# Altium PCB led_em_kian_110v_v2_TEST2.PcbDoc
Units mil, origin at the board's own origin, x right, y up, seen from the top; angles counter-clockwise.
Board outline 4067 x 3086 mil, 2 copper layers (Top Layer, Bottom Layer); 69 components, 37 nets, 183 pads, 0 vias.
Unrouted connection lines stored in the file: 6.
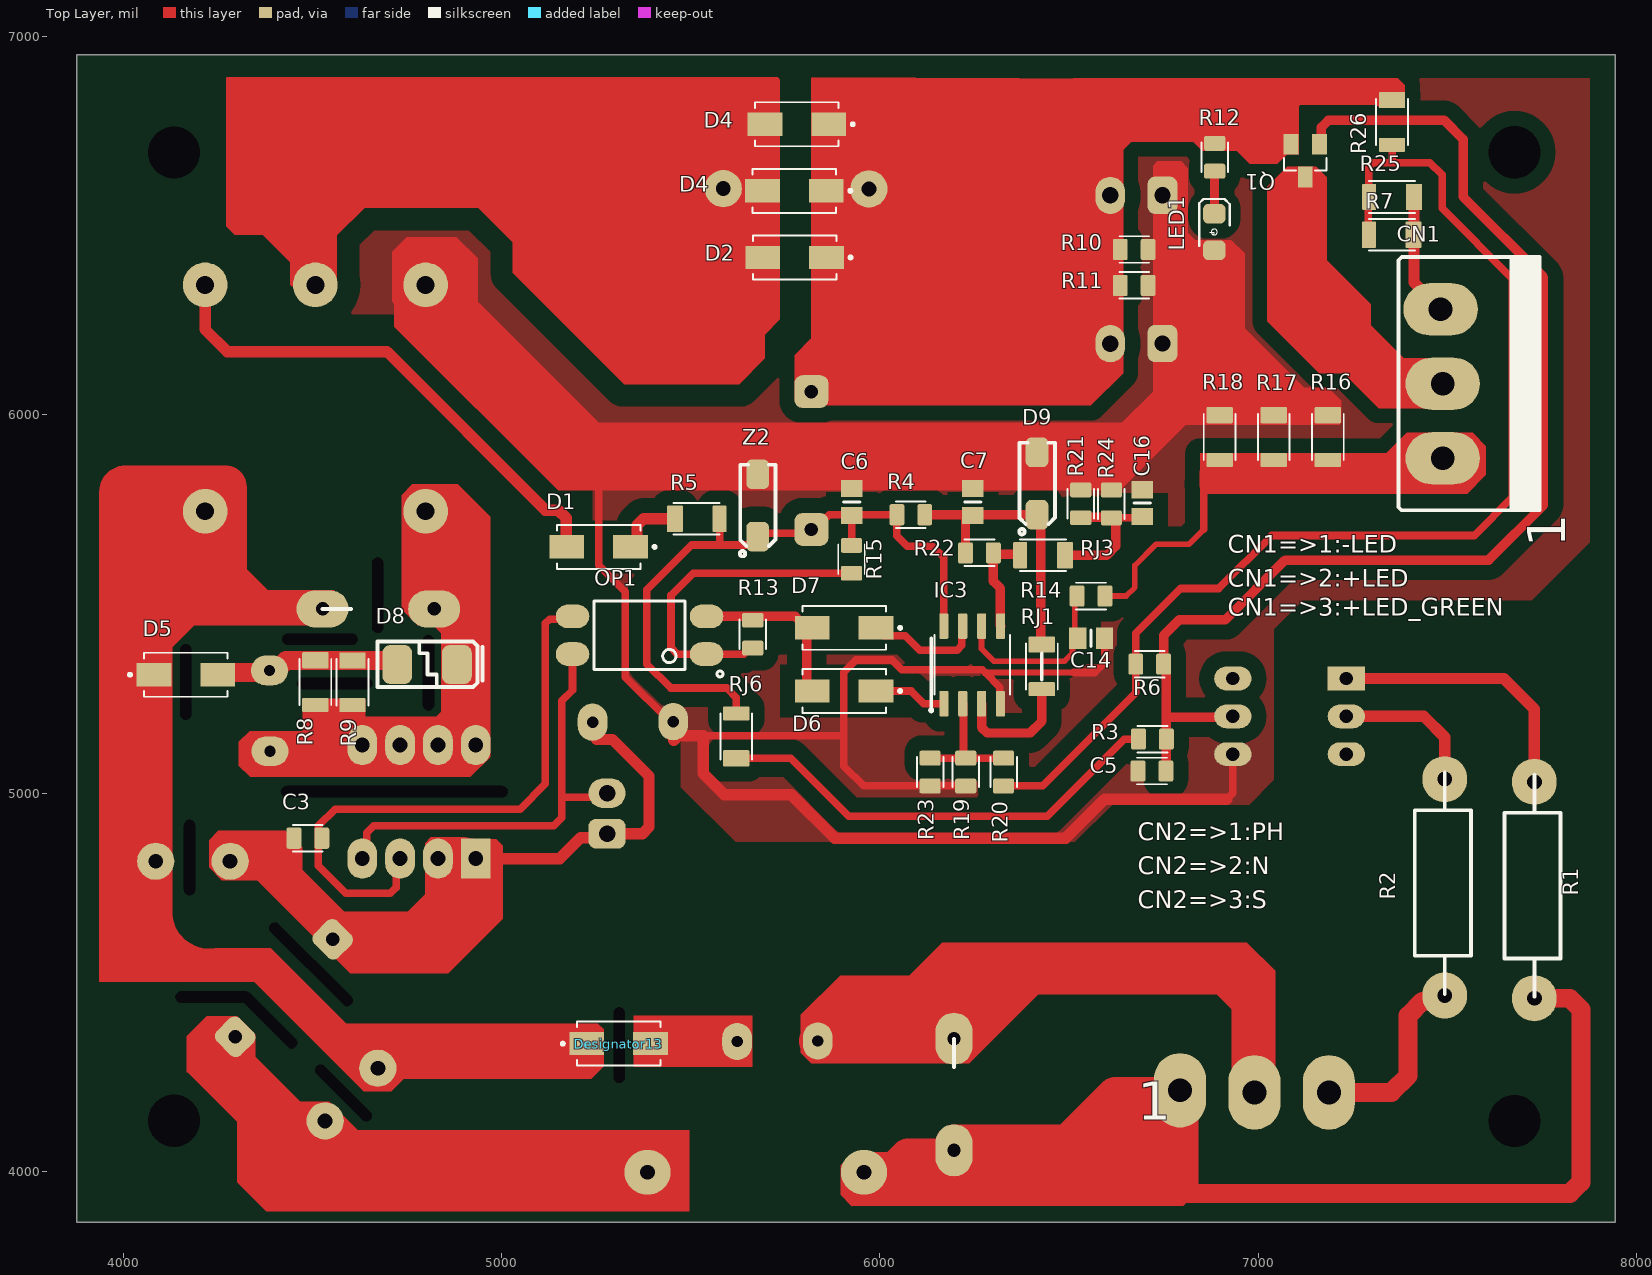
[diagram p0: Top Layer view]
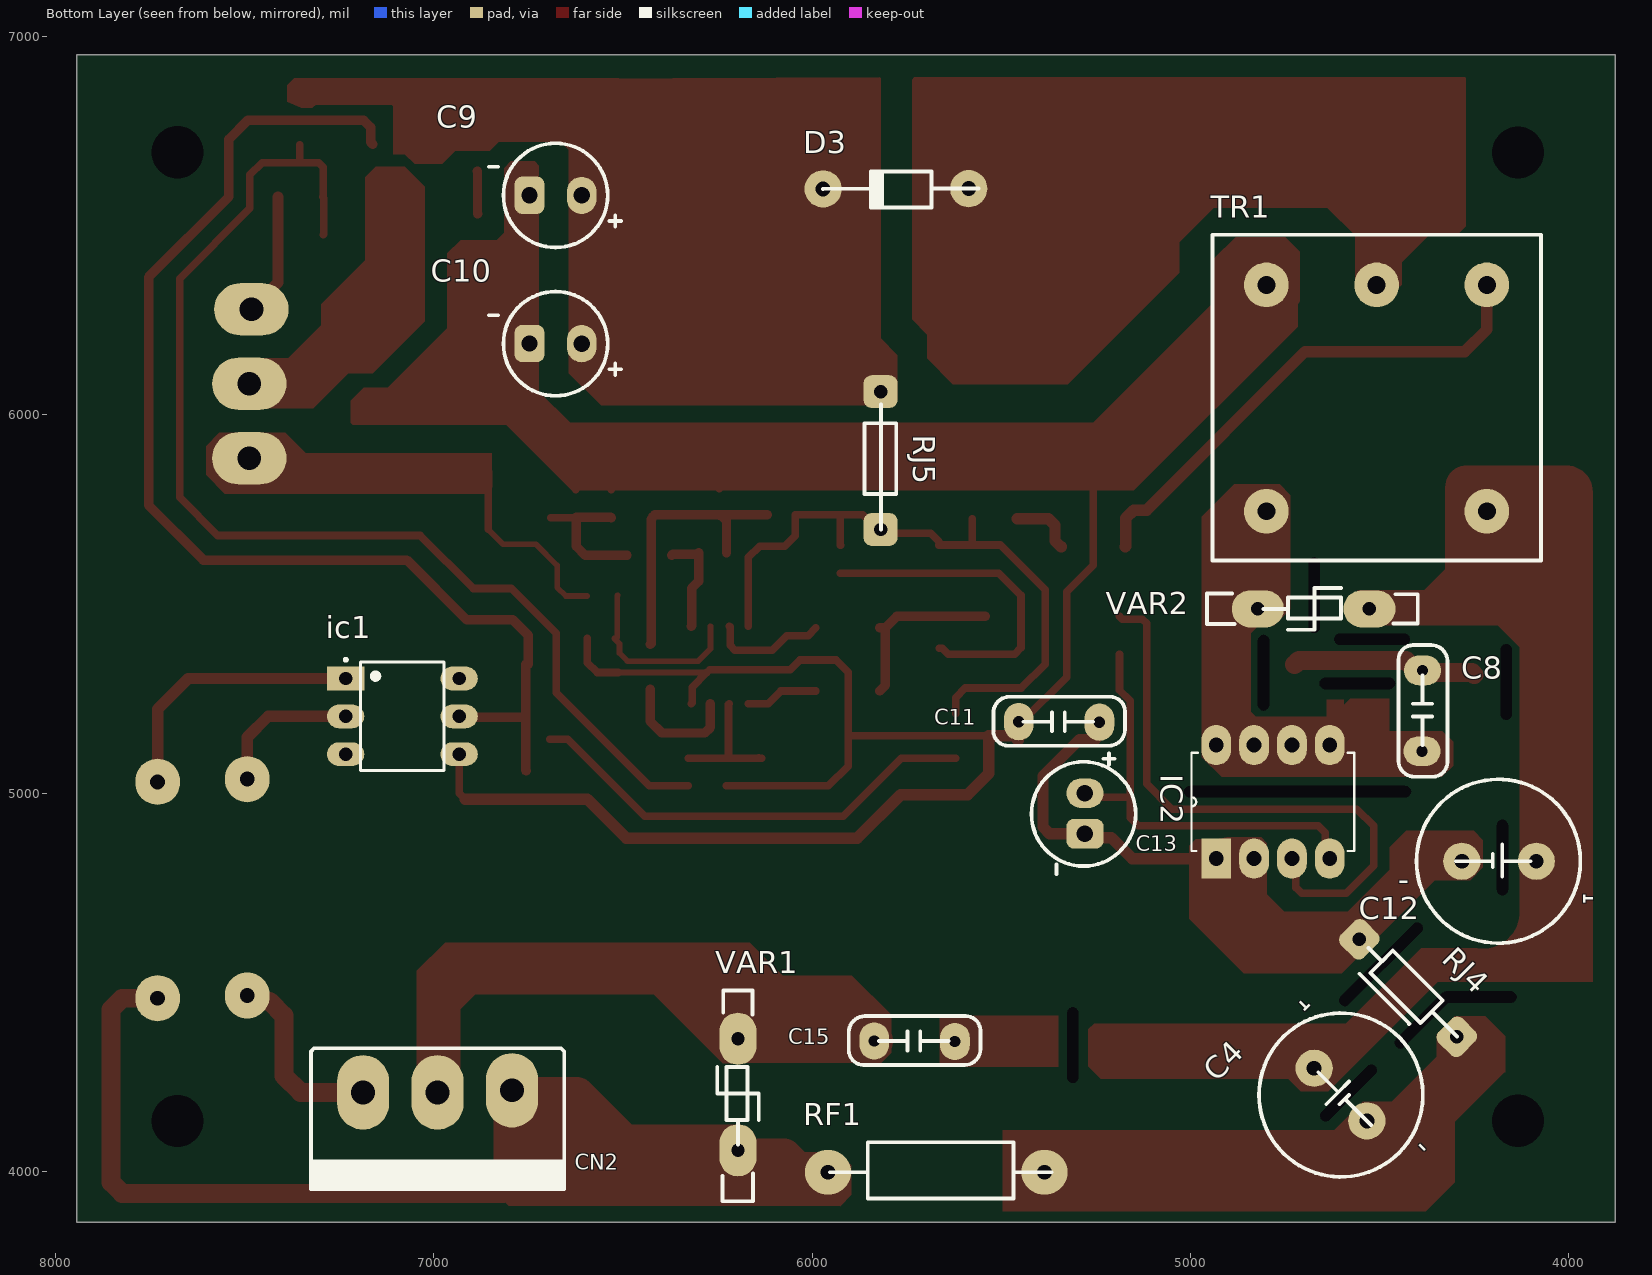
[diagram p1: Bottom Layer view, seen from below]
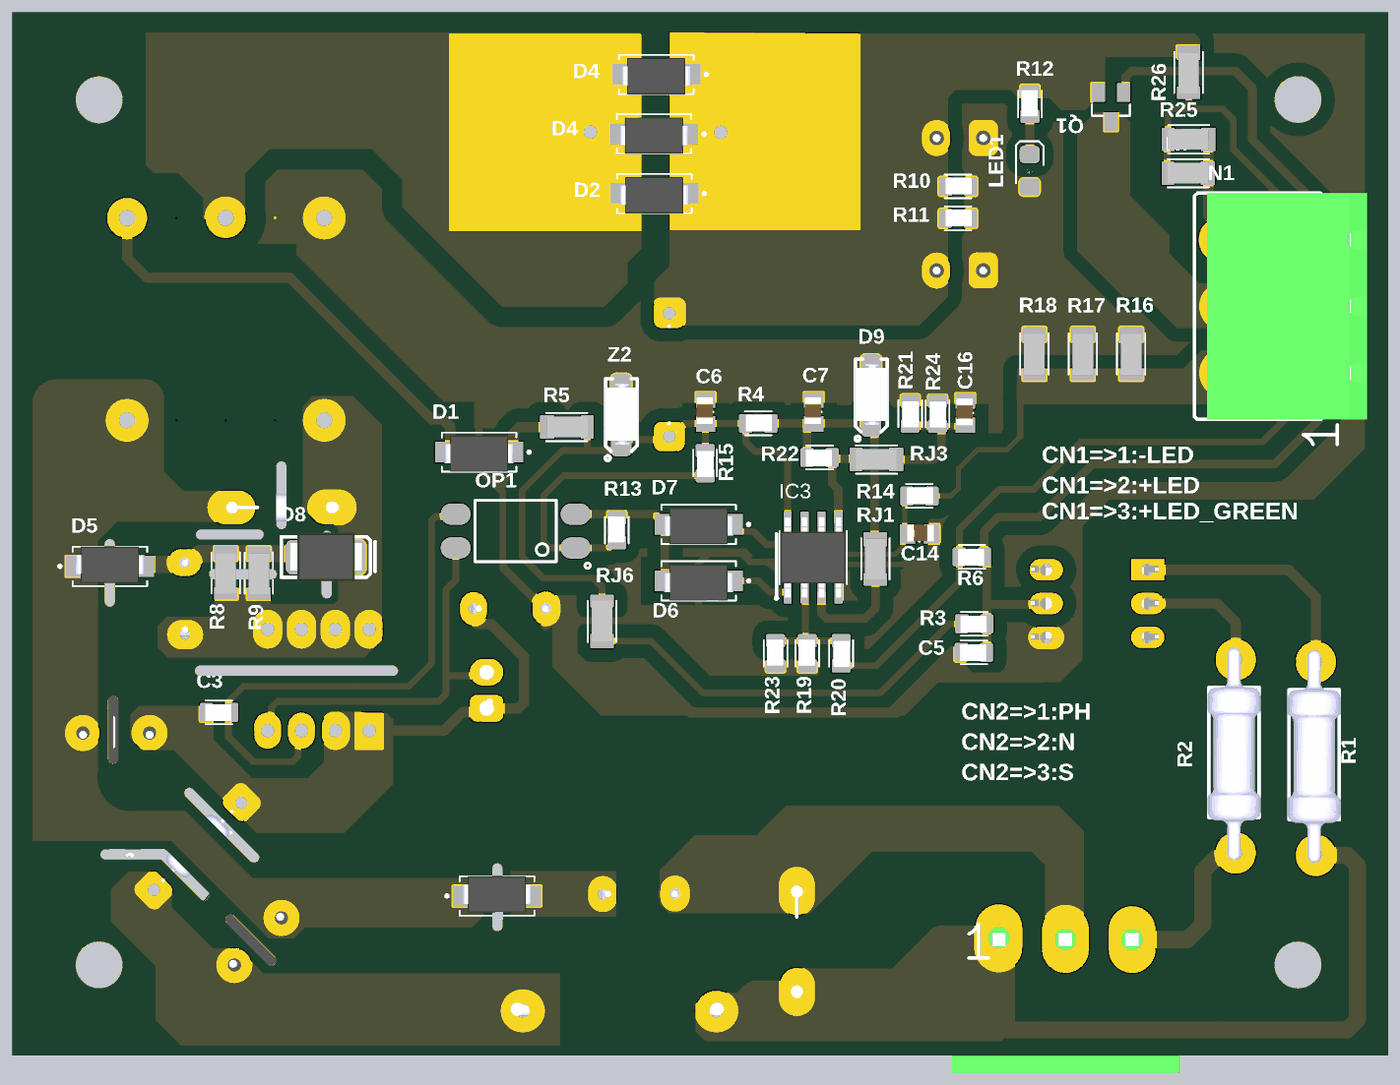
[diagram p2: 3D render of the assembled board from above, using the file's embedded part models]
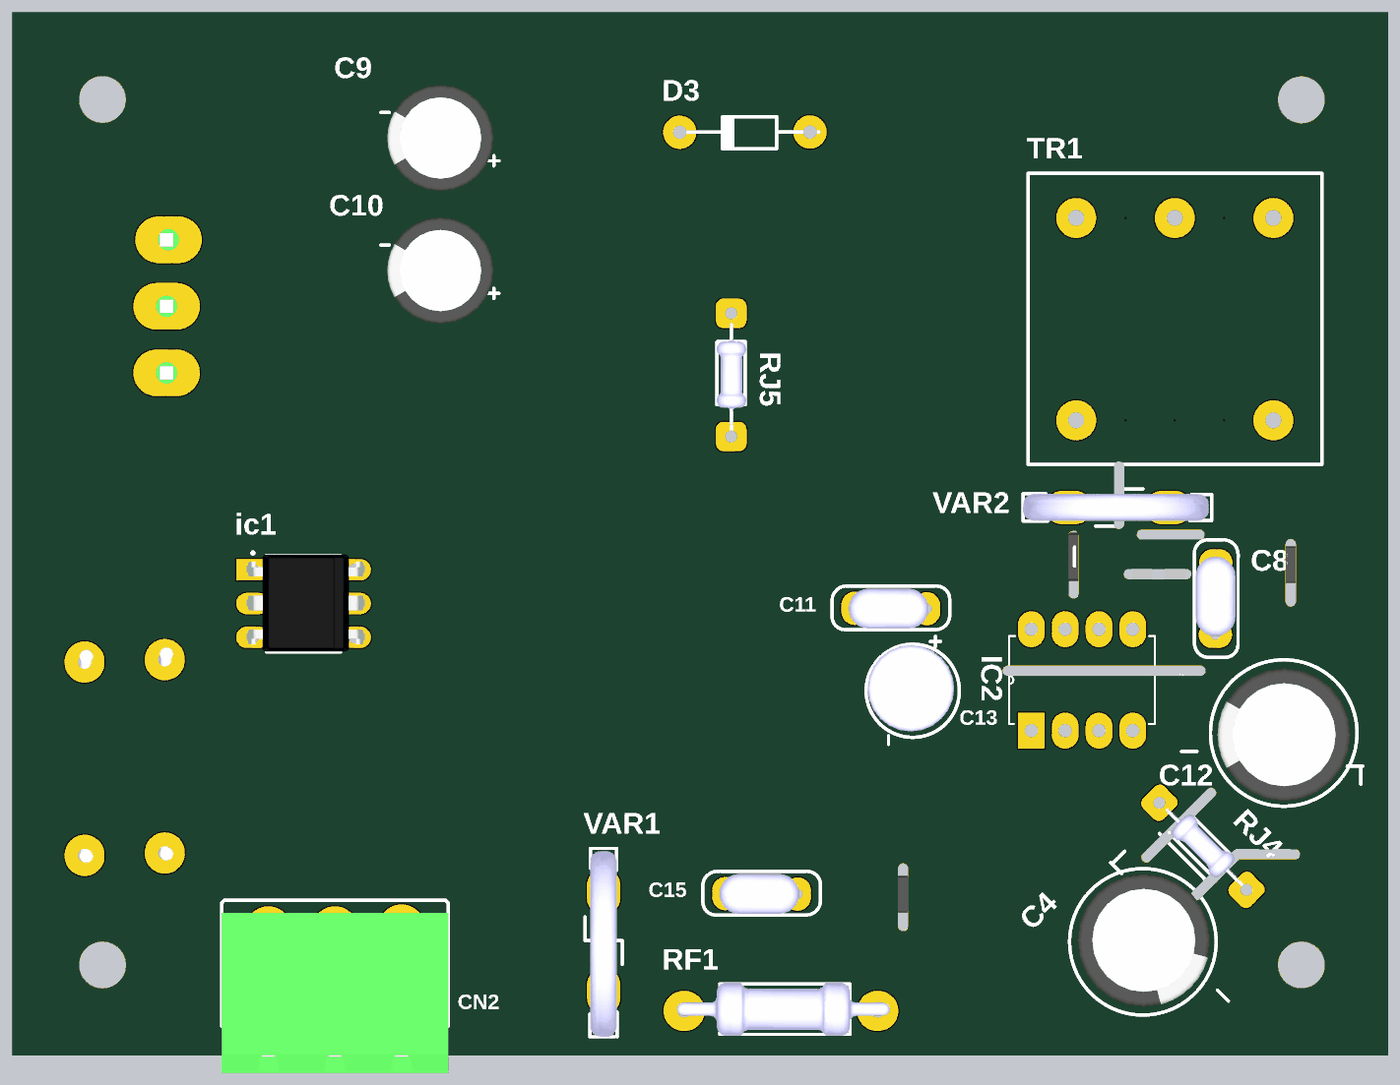
[diagram p3: 3D render of the assembled board from below, using the file's embedded part models]

## Layer stack, top to bottom
Top Solder: solder mask 0.4, Solder Resist, Dk 3.5
Top Layer: signal copper 1.4
Dielectric 1: dielectric 12.6, FR-4, Dk 4.8
Bottom Layer: signal copper 1.4
Bottom Solder: solder mask 0.4, Solder Resist, Dk 3.5

## Board outline
3877,3866 3877,6952 7944,6952 7944,3866

## Design rules (kind name [scope] priority, off if disabled: settings)
Clearance "poly < HV" [InNamedPolygon('PG') <  InNet('NetD2_A')] p1: gap=60 ignorepadtopadclearanceinfootprint=FALSE
Clearance POLY [InNamedPolygon('PG')] p2: gap=40 ignorepadtopadclearanceinfootprint=FALSE
Clearance COM_HV [InComponent('CN2')+ InComponent('EMI1') + InComponent('BR1') + inNet('for')+InComponent('VAR1')] p3: gap=0 ignorepadtopadclearanceinfootprint=FALSE
Clearance SN [InNetClass('SN')] p4: gap=15 ignorepadtopadclearanceinfootprint=FALSE
Clearance HV [InNetClass('HV')] p5: gap=15 ignorepadtopadclearanceinfootprint=FALSE
Clearance NORMAL [All] p6: gap=15 ignorepadtopadclearanceinfootprint=FALSE
PolygonConnect [All] p1: connectstyle=Direct reliefconductorwidth=10 reliefentries=4 polygonreliefangle="90 Angle" airgapwidth=10
RoutingVias [All] p1: holewidth=28 width=50 viastyle="Through Hole" minholewidth=28 minwidth=50 maxholewidth=28 maxwidth=50
SolderMaskExpansion [All] p1: expansion=4 istentingtop=FALSE
Width HV_1 [InNetClass('HV')+InNetClass('SN')] p1: maxlimit=120 minlimit=10 preferedwidth=50 toplayer_minwidth=30 minimp=50.000000 maximp=50.000000 favimp=50.000000
Width all [All] p2: maxlimit=100 minlimit=10 preferedwidth=10 minimp=50.000000 maximp=50.000000 favimp=50.000000
30 further rules are at their usual default settings.

## Classes and differential pairs
net class SN: +300V_P NetC8_1 NetC8_2
net class POWER_OUT: +LED_G +LED_OUT -LED_OUT
component class U_led_em_kian_220v_v2_SWITCHING: C6 C7 C8 C9 C10 C11 C13 C14 C16 D1 D2 D3 D4 D5 D6 D7 IC2 IC3 LED1 OP1 Q1 R4 R7 R8 R9 R10 R11 R12 R13 R14 R15 R16 R17 R18 R19 R20 R21 R22 VAR2 Z2
component class U_led_em_kian_220v_v2_RECTIFIRER&SIGNAL: C4 ic1 R1 R2 R3 RF1 VAR1
component class U_led_em_kian_220v_v2_CONRCTOR: CN1 CN2
net class HV: +300V_P "N OL_EMI" NOL PH PH_EMI SIGNAL-220V

## Components (designator, comment, footprint, x,y, rotation, side; value= is the part's Value field where it differs from the comment)
C3 "1K" RES/0805 4446.91,4844.25 r0 top (schematic designator R15)
C4 "6.8uF-400V" CAP-EL_P5MM 4673.56,4273 r225 bottom
C5 "10K" RES/0805 6677.82,5021.91 r0 top (schematic designator R3)
C6 "100nF" CAP-0805 5926.85,5805.99 r270 top
C7 "100nF" CAP-0805 6246.85,5805.99 r270 top
C8 "1N" CAP/100nF/275V/poly 4386.64,5324.31 r270 bottom
C9 "1000uF-10V" CAP-EL-P3.5MM 6747,6580 r180 bottom
C10 "1000uF-10V" CAP-EL-P3.5MM 6747,6188 r180 bottom
C11 "1N" CAP/100nF/275V/poly 5454,5189 r180 bottom
C12 "6.8uF-400V" CAP-EL_P5MM 4085.61,4820.39 r0 bottom
C13 "10U/25V" cap/330u/16v 5279,4892.93 r90 bottom
C14 "100nF" CAP-0805 6594.99,5408.15 r180 top
C15 "1N" CAP/100nF/275V/poly 5836,4345 r180 bottom (schematic designator C11)
C16 "100nF" CAP-0805 6694.85,5802.85 r270 top
CN1 "LED_OUT" CONECTOR/FONIX/3PIN 7487.67,5885.3 r90 top
CN2 "INPUT-24-S" CONECTOR/FONIX/3PIN 7186.85,4209 r180 bottom
D1 "" DIOD/1N4007/SMD 5341.75,5651 r180 top
D2 "" DIOD/1N4007/SMD 5859.75,6416 r180 top
D3 "" DIOD/1N4007/DIP 5971.97,6597.84 r180 bottom
D4 "" DIOD/1N4007/SMD 5865.56,6768.08 r180 top
D4 "" DIOD/1N4007/SMD 5859,6592.04 r180 top
D5 "US" DIOD/1N4007/SMD 4080.75,5313 r0 top
D6 "4148" DIOD/1N4007/SMD 5990.75,5270 r180 top
D7 "4148" DIOD/1N4007/SMD 5990.75,5437 r180 top
D8 "Comment" TVS-5V-SMD 4724.52,5340 r0 top
D9 "4.7V" DIOD/RS1J 6411.24,5821.75 r90 top (schematic designator Z2)
Designator13 "Comment" DIOD/1N4007/SMD 5224.75,4338 r0 top
ic1 "h11a1" h11a1 7237.83,5306.16 r180 bottom
IC2 "DK125" DIP8 4632,4827 r90 bottom
IC3 "LM358" SOP-8 6249,5354 r90 top
LED1 "RED" LED/0805 6884,6531.46 r270 top
OP1 "pc817" pc817 5357,5423 r180 top
Q1 "AO340" AO3401A 7119.4,6676.69 r180 top (schematic designator M1)
R1 "33K" RES/1W 7730,4458 r90 top
R2 "33K" RES/1W 7493,4465 r90 top
R3 "10K" RES/0805 6679.14,5106.21 r0 top
R4 "1K" RES/0805 6123.09,5772.75 r180 top
R5 "18R" RES/1206 5516,5720 r0 top
R6 "10K" RES/0805 6671.91,5304.25 r0 top (schematic designator R3)
R7 "18R" RES/1206 7353,6481 r180 top
R8 "75K" RES/1206 4502.85,5293.49 r270 top
R9 "75K" RES/1206 4601,5293 r270 top
R10 "330" RES/0805 6713.47,6473.75 r180 top
R11 "330" RES/0805 6713.47,6378.75 r180 top
R12 "1K" RES/0805 6848.25,6722.09 r270 top
R13 "1K" RES/0805 5627.25,5461.47 r270 top
R14 "330" RES/0805 6599.47,5557.75 r180 top
R15 "1K" RES/0805 5961.75,5576.91 r90 top
R16 "1.2R" RES/1206 7179,5941.18 r270 top
R17 "1.2R" RES/1206 7036,5941.18 r270 top
R18 "1.2R" RES/1206 6893,5941.18 r270 top
R19 "330" RES/0805 6190.25,5097.12 r270 top
R20 "330" RES/0805 6363.75,5014.57 r90 top
R21 "330" RES/0805 6567.75,5723.53 r90 top
R22 "330" RES/0805 6221.91,5598.25 r0 top
R23 "330" RES/0805 6096.2,5097.22 r270 top (schematic designator R19)
R24 "330" RES/0805 6648.69,5723.15 r90 top (schematic designator R21)
R25 "18R" RES/1206 7354,6581 r180 top (schematic designator R7)
R26 "18R" RES/1206 7348.64,6774.17 r270 top (schematic designator R7)
RF1 "1.1R" RES/1W 5958,3998 r180 bottom
RJ1 "1.2R" RES/1206 6423,5335.18 r270 top (schematic designator R16)
RJ3 "18R" RES/1206 6431.49,5634.15 r180 top
RJ4 "Comment" RES/0.25W 4553.72,4613.72 r225 bottom
RJ5 "0R" RES/0.25W 5819,6061.48 r270 bottom (schematic designator R6)
RJ6 "18R" RES/1206 5625.43,5149.84 r90 top
TR1 "Comment" TRANS_KARA 4799.34,5745 r180 bottom
VAR1 "250V_RMS" varistor 6196,4351 r270 bottom
VAR2 "250V-RMS" varistor 4527,5487 r0 bottom
Z2 "4.7V" DIOD/RS1J 5672.84,5763.75 r90 top

## Footprints (in the part's own frame and the unit in brackets; to place one, negate y for a bottom-side part, rotate by r counter-clockwise, add the part's x,y. Pads: shape width x height; smd on the part's side, far side on the other; paste and mask are expansions set on the pad)
AO3401A [mm]
  rect 1x1.4 smd: D(-0.127,1.227) G(-1.077,-0.973) S(0.823,-0.973)
  silkscreen extent -1.55,-0.06 1.3,0.79
CAP-0805 [mm]
  rect 1.15x1.45 smd: 1(0.025,-0.022) 2(1.825,-0.022)
  silkscreen extent 0.93,-0.57 0.93,0.53, body extent -0.17,-0.71 1.84,0.54, height 0.94
CAP-EL-P3.5MM [mm]
  oval 2x2.5 hole 1.1: +(3.5,0)
  rrect50% 2x2.5 hole 1.1: -(0,0.01)
  silkscreen extent -2.73,-3.5 6.13,3.5, body extent -2.25,-4 5.75,4, height 11.5
CAP-EL_P5MM [mm]
  round 2.5 hole 1: +(0.01,0.01) -(5.01,0.01)
  silkscreen extent -2.95,-5.49 8.05,5.51, body extent -2.48,-4.86 7.52,5.14, height 16
CAP/100nF/275V/poly [mm]
  oval 2x2.5 hole 0.762: 1(0,0) 2(5.418,-0.035)
  silkscreen extent -1.7,-1.61 7.13,1.67, body extent -0.46,-1.52 5.54,1.48, height 12.8
cap/330u/16v [mm]
  oval 2x2.5 hole 1.1: +(2.72,0)
  rrect50% 2x2.5 hole 1.1: -(0,0)
  silkscreen extent -2.7,-3.41 5.4,3.59, body extent -1.74,-3.02 4.76,3.48, height 11
CONECTOR/FONIX/3PIN [mm]
  oval 3.5x5 hole 1.6: 1(0,0) 2(5,0) 3(10,0.144)
  silkscreen extent -3.5,-6.5 13.5,2.96, body extent -3.5,-10 13.5,2, height 8.8
DIOD/1N4007/DIP [mm]
  round 2.5 hole 1: A(9.8,0) K(0.025,-0.021)
  silkscreen extent 0.02,-1.26 10.46,1.15
DIOD/1N4007/SMD [mm]
  rect 2.33x1.56 smd: A(4.299,0) K(0.019,0)
  silkscreen extent -1.7,-1.48 4.96,1.48, body extent -0.44,-1.24 4.76,1.49, height 2.6
DIOD/RS1J [mil]
  rrect50% 78.74x60 smd: A(79.25,-4.16) K(-85.75,-4.16)
  silkscreen extent -138,-52 104,43, body extent -91,-57 90,46, height 83
DIP8 [mm]
  rect 2.7x2 hole 1: 1(0,7.62)
  oval 2.7x2 hole 1: 2(0,5.08) 3(0,2.54) 4(0,0) 5(7.62,0) 6(7.62,2.54) 7(7.62,5.08) 8(7.62,7.62)
  silkscreen extent 0.51,-1.65 7.11,9.27
h11a1 [mm]
  rect 2.5x1.6 hole 0.9: 1(0.123,-0.08)
  oval 2.5x1.6 hole 0.9: 2(0.123,-2.62) 3(0.123,-5.16) 4(7.743,-5.16) 5(7.743,-2.62) 6(7.743,-0.08)
  silkscreen extent 0.03,-6.27 6.73,1.28, body extent -0.7,-6.23 8.9,1.07, height 4.75
LED/0805 [mm]
  rrect50% 1.3x1.5 smd: A(2.45,0) K(0,0)
  silkscreen extent -0.99,-1.02 2.16,1.03
pc817 [mm]
  oval 2.25x1.6 smd: 1(-4.699,1.409) 2(-4.699,-1.131) 3(4.301,-1.131) 4(4.301,1.409)
  silkscreen extent -5.8,-2.16 2.85,2.94
RES/0.25W [mm]
  rrect50% 2.2x2.3 hole 0.9: 1(0,0) 2(9.258,0)
  silkscreen extent 0.85,-1.07 9.26,1.05, body extent 0.81,-1.08 8.41,1.12, height 2.1
RES/1W [mm]
  oval 3.1x3 hole 1: 1(0,0) 2(14.527,0)
  silkscreen extent 0.11,-1.76 15,2.02, body extent -0.56,-1.87 15.44,2.13, height 5
RES/0805 [mm]
  rrect25% 1x1.42 smd: 1(0.113,0.933) 2(1.983,0.933)
  silkscreen extent 0.05,0.04 2.05,1.82, body extent 0,0.28 2,1.53, height 0.6
RES/1206 [mm]
  rrect14% 1.09x1.77 smd: 1(-1.469,0.131)
  rrect14% 0.94x1.77 smd: 2(1.536,0.131)
  silkscreen extent -1.55,-0.93 1.55,1.2, body extent -1.51,-0.64 1.59,0.91, height 0.55
SOP-8 [mm]
  rrect25% 1.71x0.61 smd: 1(-2.986,2.032) 2(-2.986,0.762) 3(-2.986,-0.508) 4(-2.986,-1.778) 5(2.224,-1.778) 6(2.224,-0.508) 7(2.224,0.762) 8(2.224,2.032)
  silkscreen extent -3.53,-2.4 1.62,2.98, body extent -3.38,-2.32 2.62,2.58, height 1.75
TRANS_KARA [mm]
  round 3 hole 1.2: 1(0,0) 5(14.8,0) 6(0,15.2) 8(7.4,15.2) 10(14.8,15.2)
  round 0 all layers, no hole: 2(3.7,0) 3(7.4,0) 4(11.1,0) 7(3.7,15.2) 9(11.1,15.2)
  silkscreen extent -3.61,-3.31 18.44,18.56
TVS-5V-SMD [mm]
  rrect50% 2x2.6 smd: 1(4,0) 2(0,0)
  silkscreen extent -1.33,-1.53 5.72,1.54, body extent -0.66,-1.79 4.74,1.83, height 2.43
varistor [mm]
  oval 3.5x2.5 hole 0.9: 1(0,0) 2(7.493,0)
  silkscreen extent -3.24,-1.4 10.91,1.4, body extent -3.06,-1.02 10.94,0.98, height 16.4

## Part data
C3 C5 R3 R4 R5 R6 R7 R8 R9 R10 R11 R12 R13 R14 R15 R16 R17 R18 R19 R20 R21 R22 R23 R24 R25 R26 RJ1 RJ3 RJ5 RJ6: library part RES/SMD
C4 C9 C10 C13: library part cap-electrolit
C6 C7 C12 C14 C16: library part cap_smd
C8 C11 C15: library part cap-poly
CN1 CN2: library part CONECTOR/FONIX/3PIN
D1 D2 D3 D4 D4 D5 D6 D7: library part DIOD/RECTIFIERS
D9 Z2: library part zener-0.5w
LED1: library part LED-1COLER
Q1: library part MOSFET_P_CH
R1 R2 RF1: library part RES/>=1W
VAR1 VAR2: library part varistor

## Free pads (board coordinates)
  round 0 hole 30 slot 200 at 90 deg: 1(4165.33,5293.82) 1(4175.33,4829.82) 1(5311,4334) rr(4672.83,5523.23) rr(4806.83,5318.23)
  round 60 hole 137.8: 2(4133.86,4134) 2(4134,6692.91) 2(7677,4133.86) 2(7677.17,6694)
  round 0 hole 30 slot 200 at 0 deg: rr(4238,4461) rr(4520,5407) rr(4559,5290)
  round 0 hole 30 slot 200 at 135 deg: rr(4385,4400) rr(4582.35,4207.53)
  round 0 hole 30 slot 300 at 135 deg: rr(4496.35,4547.53)
  round 0 hole 30 slot 600 at 0 deg: rr(4717,5004)

## Nets (pads, with @x,y where several pads share a name; then routed paths per layer and width w, separated by ;. In a path a pad name is that pad's centre, name@x,y a point inside that pad or via, vN(x,y) a via of type N, cw(c..) or ccw(c..) an arc to the next point about the centre after c; other vN are vias at no path point)
+5: C6.2 IC3.8 R3.1 R4.2 R5.2 R15.2 RJ5.2 RJ6.1 RJ6.2 Z2.K | length 3005.7
  Top Layer w20: R5.2 5576.49,5659.51 5580,5656 ; RJ6.1 5764.99,5092.01 5918,4939 6442,4939 6645.64,5142.64 6692.61,5142.64 R3.1@6692.93,5142.96 ; RJ6.2 5620.28,5252.72 5595,5278 5447,5278 5384,5341 5384,5537 5503,5656 5580,5656 ; Z2.K@5664.81,5656 5580,5656 ; Z2.K@5664.81,5665.81 Z2.K 5686.5,5687.5 5809.5,5687.5 RJ5.2 5827.28,5697 5866.28,5736 R4.2 6045,5681 6073,5653 6139,5653 6169,5623 IC3.8 ; R15.2 5925.5,5655.5 5925.5,5733.63 C6.2
+100v_in: C15.1 C15.2 CN2.2 Designator13.A VAR1.1 | length 1567.9
  Top Layer w100: C15.1 5842,4351 VAR1.1 6196.79,4351.79 6196.79,4459.79 6258,4521 6931.42,4521 6990,4462.42 CN2.2
+300V_P: C4.+ C12.+ D5.K Designator13.K TR1.5 VAR2.1
+LED_G: CN1.3 R7.1 R25.1 | length 325.9
  Top Layer w30: R25.1 7411.82,6350.17 7482,6279.99 CN1.3
+LED_OUT: CN1.2 Q1.D | length 793.6
  Top Layer w50: Q1.D 7124.4,6326.6 7335,6116 7335,6104 7364,6075 7494.82,6075 CN1.2
+OUT: C9.+ C10.+ D2.K D3.K D4.K Q1.S R6.1 R7.2 R10.2 R11.2 R12.1 R20.1 R25.2 R26.1 R26.2 RJ5.1 | length 4901
  Top Layer w15: 6590,6834 6590,6833.79 6598.79,6825 6889,6825 7070,6825 7087,6808 Q1.S
  Top Layer w20: R20.1 6430.03,5019.03 6676.38,5265.38 R6.1 6676.38,5422.37 6795.01,5541 6896,5541 7036,5681 7571,5681 7671.98,5781.98 7671.98,6359.98 7486,6545.97 7486,6634 7454,6666 7358,6666 ; R12.1 6885,6821 6889,6825 ; 7070,6825 7076.99,6831.99 R26.1 ; R7.2 7290.57,6477.8 7290.57,6572.91 R25.2 ; R25.2@7292.51,6575.85 7292.51,6654.28 7304.23,6666 7358,6666 ; R26.2 7353.79,6670.21 7358,6666
  Top Layer w25: 6332,6507 6332,6549.5 6402.5,6620 6609.2,6620 C10.+
-LED_OUT: CN1.1 R14.1 R16.2 R17.2 R18.2 | length 578.6
  Top Layer w15: R14.1 6651,5521 6674,5544 6674,5602 6730,5658 6817,5658 6856,5697
  Top Layer w20: 6856,5697 6856,5854.89 6881.81,5880.69 R18.2
for: pad.rr@4238,4461 pad.rr@4385,4400
fuze: 
GND: C5.1 C6.1 C7.1 C9.- C10.- C11.1 C14.1 C16.1 D9.A ic1.4 IC3.4 LED1.A R10.1 R11.1 R16.1 R17.1 R18.1 R19.2 R21.2 R23.2 R24.2 TR1.6 Z2.A | length 7859.2
  Top Layer w15: 6271,5326 6278,5319 6512,5319
  Top Layer w20: 5257,5841 5257,5602 5327,5532 5327,5307 5444.07,5189.93 C11.1@5444.07,5150.88 ; C11.1@5446.76,5182.52 C11.1@5458,5171.28 ; 5533,5152 5905,5152 ; R19.2 6125,5019.03 5956.97,5019.03 5905,5071 5905,5152 ; 6244,5945 6246,5943 C7.1 ; 6271,5326 6058,5326 6032,5352 5937,5352 5905,5320 5905,5152 ; 6278,5319 6316.99,5280.01 6316.99,5238.45 IC3.4 ; 6385.51,5825.24 6391,5830.73 6391,5945 ; 6512,5319 6568,5319 6594,5345 C14.1 ; R21.2 6531,5932 6544,5945 ; R24.2@6625.15,5802.01 6625.15,5930.15 6640,5945 ; 6917,4984 6933,5000 ic1.4
  Top Layer w30: 5455.31,5139.64 5467.67,5152 5533,5152 5533,5052.11 5589.11,4996 5766,4996 5881,4881 6491,4881 6594,4984 6917,4984
  Top Layer w50: 5233,5945 6244,5945 6391,5945 6544,5945 6640,5945 6717.71,5945 6747,5974.29 C10.- ; C9.- C10.- ; R18.1 R17.1@7034.85,5999 ; R16.1 R17.1 R17.1@7034.85,5999 ; C10.- 6964.61,6188.39 7020,6133 7020,6039 7031.3,6027.7 7031.3,6002.54 R17.1@7034.85,5999
gnd_in: CN2.3 R1.1 RF1.1 VAR1.2 | length 2793.8
  Top Layer w50: CN2.3@6788,4137.67 6788,3971.29 6817.29,3942 7823.71,3942 7853,3971.29 7853,4428.71 7823.71,4458 R1.1
  Top Layer w100: RF1.1 5961.47,4001.47 6039.47,4001.47 6075.1,4037.1 6195.21,4037.1 6195.21,4072.43 6196.79,4074 6497,4074 6623,4200 6778.48,4200 CN2.3
GND_P: C3.1 C4.- C11.2 C12.- C13.- IC2.1 IC2.2 RF1.2 RJ4.1 RJ4.2 | length 1756.5
  Top Layer w30: IC2.1 5153.82,4827 5209.03,4882.21 5245.14,4882.21 5246,4883.06 5246,4892.93 5372.43,4892.93 5390,4910.5 5390,5045 5293.08,5141.92 5252.08,5141.92 C11.2@5238,5156
  Top Layer w100: C12.- 4382,4820 4563,4639 4624,4578 4654,4608 4871.79,4608 4930.37,4666.58 4930.37,4795.85 4933.52,4799 IC2.1@4941,4799
"N OL_EMI": 
NetBR1_F: 
NetC8_1: C8.1 D5.A D8.2 R8.1 R9.1 | length 495.4
  Top Layer w50: D5.A 4255.71,5318.71 4363.42,5318.71 4369.02,5324.31 C8.1 4404.26,5324.31 4430.77,5350.82 R8.1@4508.49,5350.82 ; R8.1 R8.1@4508.49,5350.82 ; D8.2 4713.7,5350.82 R8.1@4508.49,5350.82
NetC8_2: C8.2 D8.1 IC2.5 IC2.6 IC2.7 IC2.8 R8.2 R9.2 TR1.1 VAR2.2
NetC13_+: C13.+ IC2.4 OP1.4 | length 1179.3
  Top Layer w20: IC2.4 4643.24,4838.24 4643.24,4895.24 4662,4914 5138,4914 5159,4935 5159,4988.76 ; OP1.4 5187.68,5272.68 5159,5244 5159,4988.76 ; C13.+@5281.64,5006 5264.41,4988.76 5159,4988.76
NetC14_2: C14.2 IC3.6 R14.2 | length 483.4
  Top Layer w15: IC3.6 6268.59,5441.15 6268.59,5381.57 6301.16,5349 6488.02,5349 6509.08,5370.05 6509.08,5394.94 C14.2 ; R14.2@6514,5523 6515.16,5521.84 6515.16,5412.13 C14.2@6518.29,5409
NetC15_2: IC3.2 R19.1 R20.2 R23.1 | length 341.2
  Top Layer w20: R23.1 R19.1@6226.9,5092.75 ; R23.1@6140.81,5093.95 R23.1@6140.9,5093.85 ; IC3.2 6221.01,5234.43 6221.01,5098.65 R19.1@6226.9,5092.75 ; R20.2 R19.1 R19.1@6226.9,5092.75
NetC16_2: C16.2 IC3.5 R21.1 R22.2 R24.1 RJ3.1 RJ3.2 | length 672.5
  Top Layer w10: R24.1 R24.1@6623.57,5727.62 ; C16.2@6690.62,5727.62 C16.2
  Top Layer w20: R24.1@6623.57,5727.62 C16.2@6690.62,5727.62
  Top Layer w25: IC3.5 6318.51,5442.05 6318.51,5541.58 6300,5560.09 R22.2 6303,5632 6368,5632 RJ3.2 ; RJ3.1 6600,5629 6623.57,5652.57 6623.57,5727.62 6623.57,5729.57 6532.57,5729.57 R21.1
NetD1_A: D1.A TR1.10 | length 1355.5
  Top Layer w30: TR1.10 4216.66,6225.34 4275,6167 4697,6167 5116,5748 5150,5748 5171,5727 5171,5652.5 D1.A
NetD1_K: D1.K R5.1 | length 172.1
  Top Layer w30: D1.K 5342.29,5651 5358,5666.71 5358,5708 5375.15,5725.15 R5.1
NetD2_A: D2.A D3.A D4.A TR1.8
NetD6_K: D6.K IC3.1 | length 192.9
  Top Layer w20: D6.K 6083,5270 6116.56,5236.44 IC3.1
NetD7_K: D7.K IC3.7 | length 308.2
  Top Layer w20: D7.K 6010.71,5416.29 6066.71,5416.29 6105,5378 6204,5378 6216.99,5390.99 6216.99,5439.55 IC3.7
Netic1_1: ic1.2 R2.2 | length 393.8
  Top Layer w30: ic1.2 7438,5203 7493,5148 R2.2
Netic1_2: ic1.1 R1.2 | length 722.6
  Top Layer w30: ic1.1 7649,5303 7730,5222 R1.2
NetIC2_3: C3.2 IC2.3 OP1.3 | length 1577.8
  Top Layer w20: IC2.3 4721.72,4816.72 4721.72,4750.72 4706.36,4735.36 4588.64,4735.36 4516,4808 4516,4914 4560,4958 5049,4958 5116,5025 5116,5448.53 5127.72,5460.25 5180.41,5460.25 OP1.3
NetLED1_K: LED1.K R12.2 | length 113
  Top Layer w25: LED1.K 6884.51,6531.94 6884.51,6643.51 R12.2
NetOP1_1: OP1.1 R13.2 R15.1 | length 869.6
  Top Layer w20: R13.2 5655.73,5383.38 5639.87,5367.52 OP1.1 5464.48,5367.52 5448,5384 5448,5523 5506.38,5581.38 R15.1
NOL: 
OUT_OP: D6.A D7.A OP1.2 R13.1 | length 465.4
  Top Layer w25: OP1.2 5664,5467.52 5775.82,5467.52 D7.A@5806.34,5437 ; D6.A 5806.34,5285.16 D7.A@5806.34,5437 ; D7.A D7.A@5806.34,5437
PH: 
PH_EMI: 
SIGNAL-220V: CN2.1 R2.1 | length 505.3
  Top Layer w50: CN2.1 7352,4209 7396,4253 7396,4411.87 7434.13,4450 7478,4450 R2.1
Signal_LOGIC: C5.2 ic1.5 Q1.G R3.2 R6.2 | length 3196
  Top Layer w25: R6.2 6750,5417 6791,5458 6913,5458 7071,5616 7609,5616 7754,5761 7754,6364 7542,6576 7542,6728 7492,6778 7185,6778 7167.04,6760.04 7167.04,6720.24 Q1.G ; C5.2 6757.23,5059.98 R3.2 6757.23,5200.15 ; R6.2@6757.23,5341 6757.23,5200.15 ; ic1.5@6942.71,5200.15 6757.23,5200.15
V_REF: C7.2 D9.K IC3.3 R4.1 R22.1 RJ1.1 RJ1.2 | length 1081.2
  Top Layer w25: R4.1 D9.K 6422.91,5728.5 6422.91,5726.81 6425.53,5724.19 6425.53,5395.62 RJ1.1 ; R22.1 6226.38,5720.42 6240.09,5734.13 C7.2 ; IC3.3 6269,5173.64 6283.64,5159 6397,5159 6428.15,5190.15 RJ1.2
pads on no net: ic1.3 ic1.6 TR1.2 TR1.3 TR1.4 TR1.7 TR1.9

## Polygon pours and split planes (outlines as drawn)
GND on Top Layer "PG" (solid, remove dead copper, pour order 0): 3939,6889.76 7875.76,6889.76 7875.76,5663 7722.76,5510 7118,5510 7040.76,5432.76 7040.76,5035 6975.76,4970 6613.76,4970 6514.76,4871 5618.76,4871 5473.76,5016 5473.76,5152 5328.76,5297 5328.76,5536 5241.76,5623 5241.76,5813 5225.76,5813 4772.76,6266 3942.76,6266 3941,6267.76

## Other copper
Top Layer:
  rectangle net +100v_in: 5349,4276 5663,4412
  rectangle net NetC8_2: 4594,5191 4641,5248
  region net +OUT: 7388,6827 7388,6871 7369.24,6889.76 7064.76,6889.76 7045,6870 7051,6864 7051,6836 7059,6836 7093,6802 7111,6820 7312,6820 7321,6811 7350,6811
  region net +LED_OUT: 7498,6018 7318,6018 7226,6110 7161,6110 7024,6247 7024,6603 7077,6656 7153,6656 7181,6628 7181,6409 7298,6292 7298,6237 7385,6150 7521,6150 7547,6124
  region net +OUT: 7107,6870 7087,6890 6511,6890 6496,6875 6500,6871 6500,6779 6586,6693 6588,6695 6638,6695 6665,6722 6828,6722 6852,6698 6943,6698 6978,6663 7051,6663 7077,6689 7107,6689
  region net gnd_in: 5944,4044 5923,4044 5896,4017 5896,3938 5926,3908 5927,3909 6802,3909 6841,3948 6841,4156 6856,4171 6827,4200 6627,4200 6508,4081 6389,4081
  region net +100v_in: 6193,4286 5819,4286 5791,4314 5791,4414 5895,4518 6078,4518 6165,4605 6970,4605 7045,4530 7045,4210 7025,4190 6984,4231 6952,4231 6952,4248 6930,4270 6930,4429 6890,4469 6419,4469 6236,4286
  region net +300V_P: 4690,4212 4708,4212 4741,4245 5237,4245 5270,4278 5270,4376 5255,4391 4577,4391 4552,4416
  region net +300V_P: 4382,4501 3937,4501 3937,5796 cw(c4007,5796) 4007,5866 4269,5866 cw(c4269,5809) 4326,5809 4326,5637 4229,5540 4229,5485 4170,5426 4130,5386 4130,4894 4130,4702 ccw(c4227.93,4687.93) 4242,4590 4354,4590
  region net GND_P: 4931,4878 4986,4878 5003,4861 5003,4668 4859,4524 4600,4524 4354,4770 4261,4770 4227,4804 4227,4876 4251,4900 4430,4900 4473,4857 4473,4797 4583,4687 4752,4687 4798,4733 4798,4868 4813,4883 4904,4883
  region net GND_P: 5496,4109 4620,4109 4545,4184 4468,4184 4349,4303 4349,4363 4302,4410 4221,4410 4168,4357 4168,4263 4170,4263 4301,4132 4301,3972 4378,3895 5496,3895
  region net +300V_P: 4321,4590 4390,4590 4646,4334 4690,4334 4690,4212 4636,4212 4339,4509 4276,4509
  region net +300V_P: 4354,4590
  region net GND: 4711,6300 4711,6431 4750,6470 4881,6470 4937,6414 4937,6299 5257,5979 6640,5979 6722,6061 6722,6659 6733,6670 6796,6670 6814,6652 6814,6481 6833,6462 6929,6462 6964,6427 6964,6229 7122,6071 7185,6071 7219,6037 7219,5979 7214,5974 6809,5974 6635,5800 5150,5800 4717,6233 4717,6292
  region net -LED_OUT: 6846.43,5898 7338,5898 7392,5952 7567,5952 7602,5917 7602,5841 7601,5841 7552,5792 6862,5792 6845.54,5808.46
  region net +OUT: 5821,6892 5819,6890 5819,6202 5775,6158 5775,6038 5792,6021 5796,6025 6558,6025 6643,6110 6643,6887 6642,6888
  region net NetD2_A: 4446,6340 4442,6344 4442,6403 4369,6476 4295,6476 4272,6499 4272,6889.76 4274.24,6892 5730,6892 5736,6886 5736,6252 5696,6212 5696,6149 5628,6081 5325,6081 5030,6376 5030,6456 4939,6547 4638,6547 4565,6474 4565,6335
  region net +300V_P: 4558,5536 4382,5536 4326,5592 4326,5637 4243,5637 4227,5653 4152,5578 4152,5444 4170,5426 4188,5444 4555,5444 4575,5464
  region net NetC8_2: 4736,5786.82 4736,5486 4778,5444 4820,5444 4841,5423 4841,5215 4828,5202 4625,5202 4578,5249 4475,5249 4475,5164 4334,5164 4306,5136 4306,5073 4336,5043 4467,5043 4918,5043 4970,5095 4970,5731 4884,5817 4763.98,5817

## Silkscreen, mask and mechanical layers (free items; w line width, h text height)
Top Overlay:
  lines w10: 6428,5300 6428,5369
  text "1" at 7811.03,5650.34 h100 r90
  text "CN1=>1:-LED" at 6919.49,5619.02 h80
  text "CN1=>2:+LED" at 6919.49,5529.12 h80
  text "CN1=>3:+LED_GREEN" at 6919.49,5452.51 h80
  text "CN2=>1:PH" at 6682,4859.86 h80
  text "CN2=>2:N" at 6682,4769.97 h80
  text "CN2=>3:S" at 6682,4680.15 h80
  text "1" at 6681,4137 h100
Bottom Overlay:
  lines w10: 4420.96,4390.54 4553.19,4522.76 ; 4422.1,4389.41 4422.1,4389.9 ; 5817.89,5791.01 5817.89,5978
Top Solder:
  rectangle: 5816,6308 6384,6893
  rectangle: 5168,6304 5736,6889
Mechanical 1:
  the board outline again, w10

## Text inside footprints (layer, text, board x,y; h text height)
C4: Bottom Overlay "-" at 4413.42,4057.66 h60 r45; Bottom Overlay "-" at 4729.06,4434.96 h60 r45; Bottom Overlay "-" at 4686.72,4406.66 h60 r315
C12: Bottom Overlay "-" at 4421.82,4788.71 h60 r180; Bottom Overlay "-" at 3931.84,4745.11 h60 r180; Bottom Overlay "-" at 3981.78,4735.19 h60 r90